# Altium PCB PCB_Wiring Diagram.pcbdoc
Units mm, origin at the board's own origin, x right, y up, seen from the top; angles counter-clockwise.
Board outline 108.59 x 103.38 mm, 2 copper layers (Top Layer, Bottom Layer); 9 components, 53 nets, 92 pads, 2 vias.
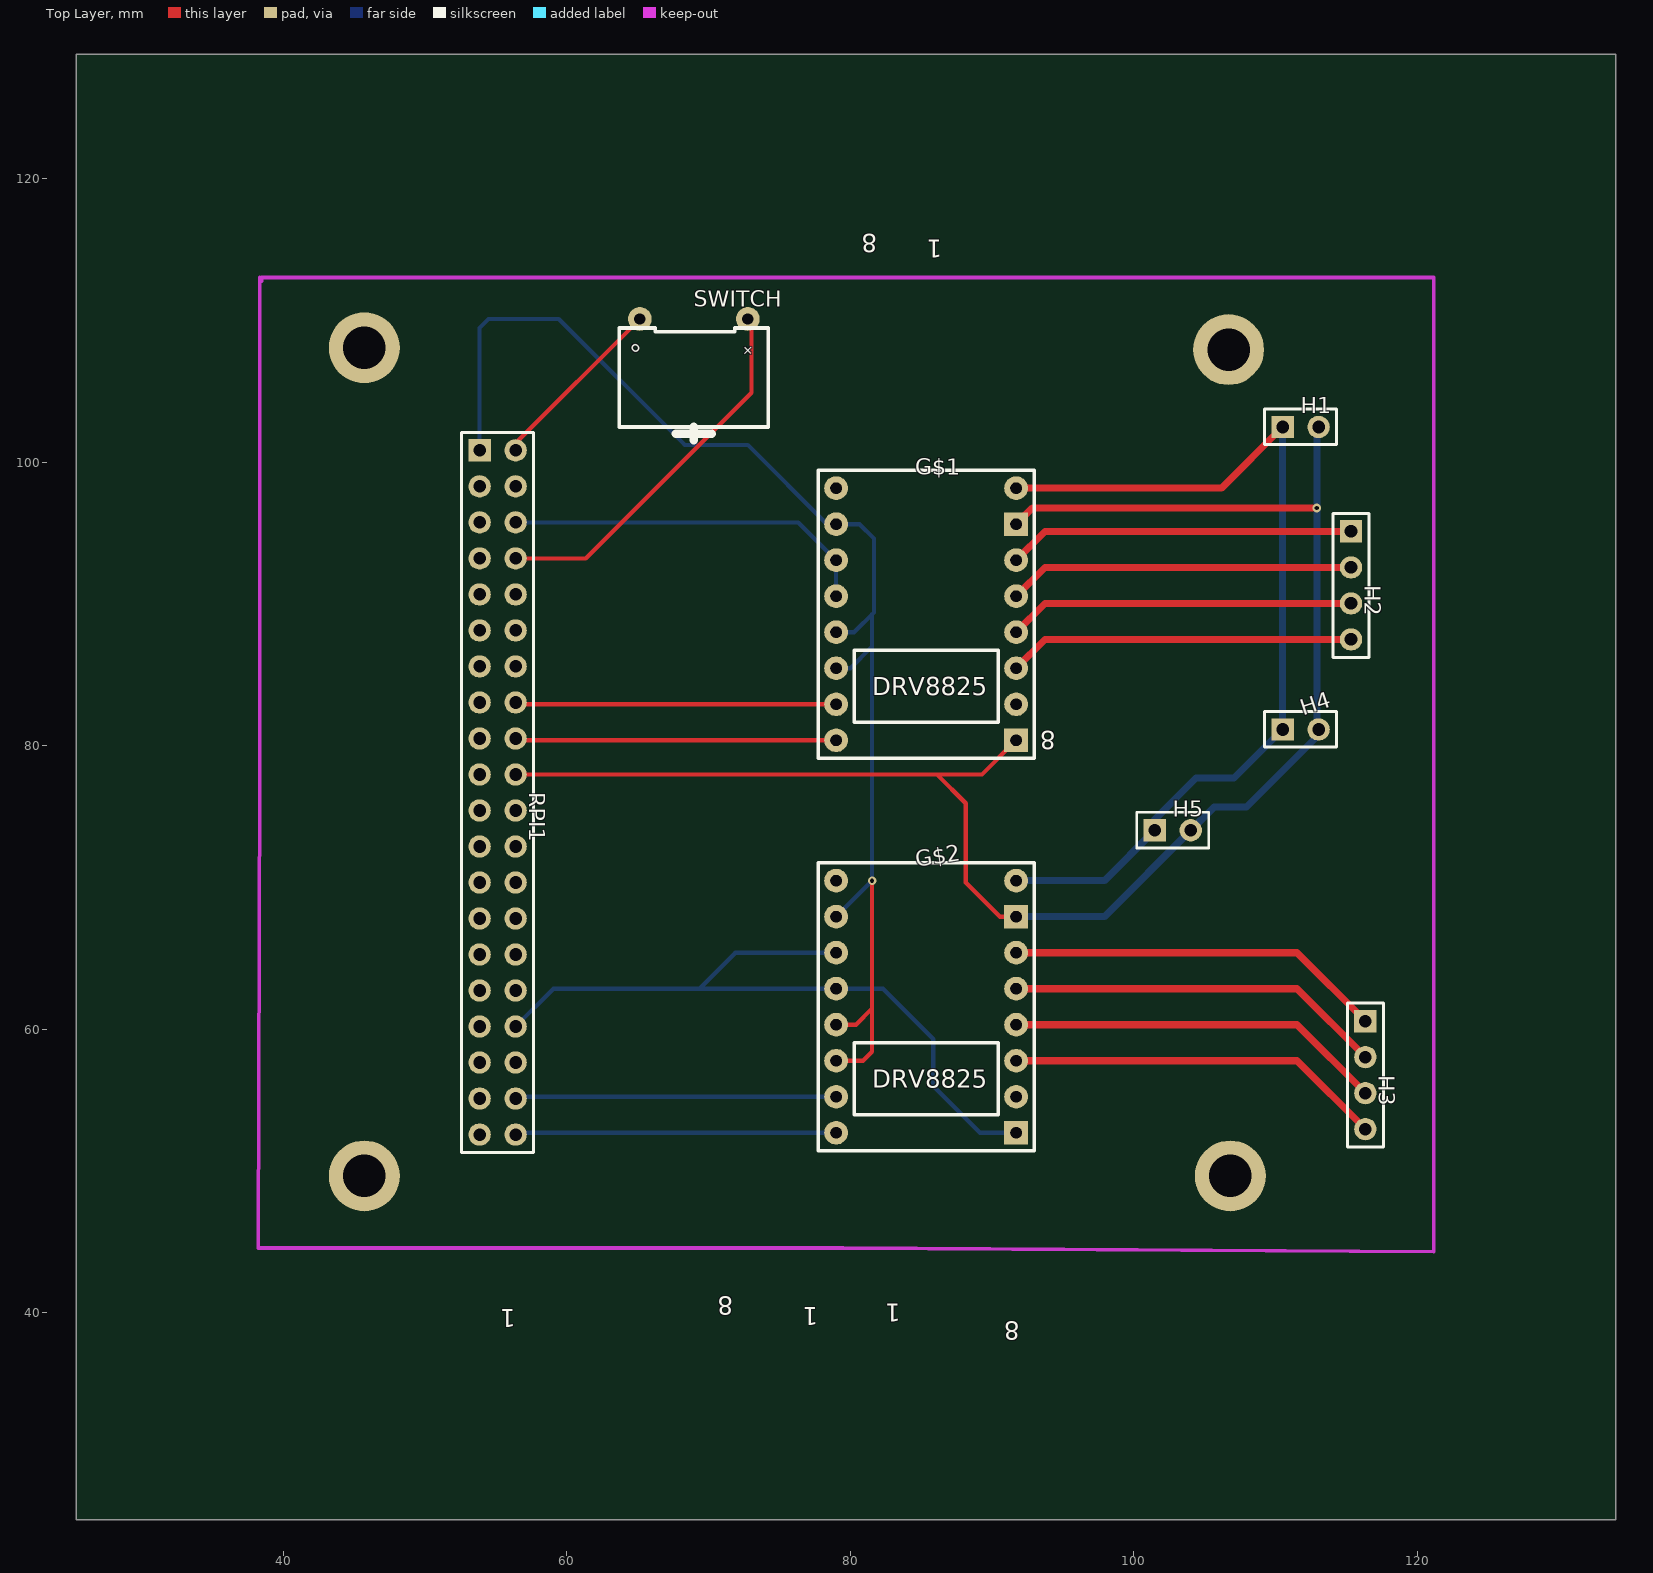
[diagram p0: Top Layer view]
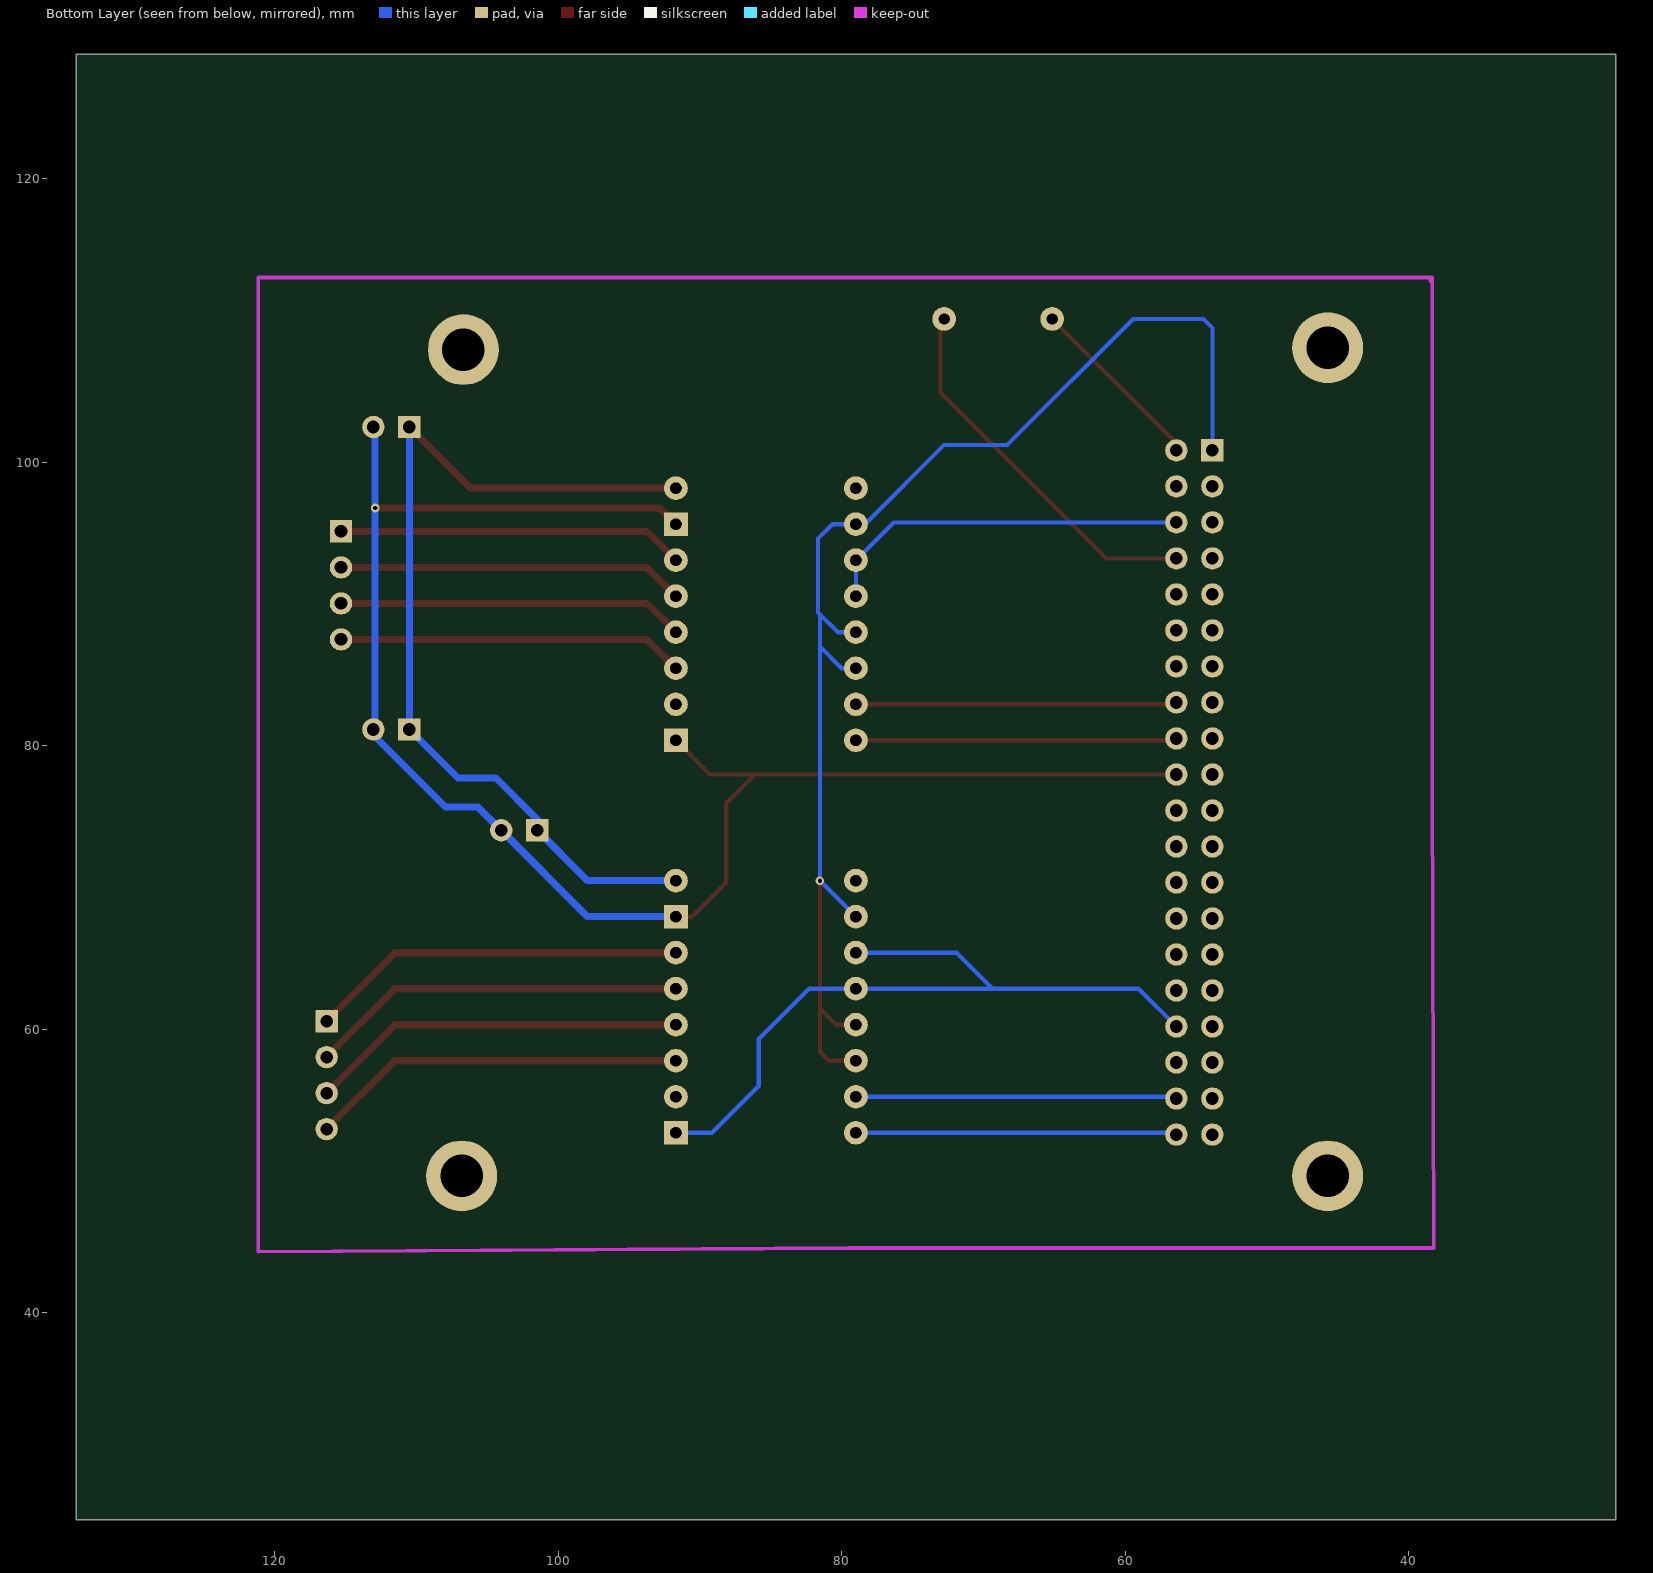
[diagram p1: Bottom Layer view, seen from below]

## Layer stack, top to bottom
Top Layer: signal copper (thickness not stored)
Dielectric: dielectric 0.32, FR-4, Dk 4.8
Bottom Layer: signal copper (thickness not stored)

## Board outline
133.988,25.4 25.4,25.4 25.4,128.778 133.988,128.778

## Components (designator, comment, footprint, x,y, rotation, side; value= is the part's Value field where it differs from the comment)
G$1 "POLOLU-DRV8825" POLOLU-DRV8825 91.694,95.631 r0 top
G$2 "POLOLU-DRV8825" POLOLU-DRV8825 91.694,67.945 r0 top
H1 "HDR-F-2.54_1x2" HDR-F-2.54_1X2 111.76,102.489 r0 top
H2 "HDR-F-2.54_1x4" HDR-F-2.54_1X4 115.316,91.313 r270 top
H3 "HDR-F-2.54_1x4" HDR-F-2.54_1X4 116.332,56.769 r270 top
H4 "HDR-F-2.54_1x2" HDR-F-2.54_1X2 111.76,81.153 r0 top
H5 "HDR-F-2.54_1x2" HDR-F-2.54_1X2 102.743,74.041 r0 top
RPI1 "Raspberry Pi 3 B+" HDR-20X2/2.54 55.118,76.708 r270 top
SWITCH "Emergency Stop" SW-08 68.961,110.109 r0 top

## Footprints (in the part's own frame and the unit in brackets; to place one, negate y for a bottom-side part, rotate by r counter-clockwise, add the part's x,y. Pads: shape width x height; smd on the part's side, far side on the other; paste and mask are expansions set on the pad)
HDR-20X2/2.54 [mil]
  rect 62x62 hole 35: 1(-950,-50)
  round 62 hole 35: 2(-950,50) 3(-850,-50) 4(-850,50) 5(-750,-50) 6(-750,50) 7(-650,-50) 8(-650,50) 9(-550,-50) 10(-550,50) 11(-450,-50) 12(-450,50) 13(-350,-50) 14(-350,50) 15(-250,-50) 16(-250,50) 17(-150,-50) 18(-150,50) 19(-50,-50) 20(-50,50) 21(50,-50) 22(50,50) 23(150,-50) 24(150,50) 25(250,-50) 26(250,50) 27(350,-50) 28(350,50) 29(450,-50) 30(450,50) 31(550,-50) 32(550,50) 33(650,-50) 34(650,50) 35(750,-50) 36(750,50) 37(850,-50) 38(850,50) 39(950,-50) 40(950,50)
  silkscreen extent -1000,-100 1000,100
HDR-F-2.54_1X2 [mil]
  rect 62x62 hole 35: 1(-50,0)
  round 62 hole 35: 2(50,0)
  silkscreen extent -100,-49 100,50
HDR-F-2.54_1X4 [mil]
  rect 62x62 hole 35: 1(-150,0)
  round 62 hole 35: 2(-50,0) 3(50,0) 4(150,0)
  silkscreen extent -200,-50 200,50
POLOLU-DRV8825 [mil]
  round 66 hole 31.5 slot 31.7 at 0 deg: A1(0,-300) A2(0,-400) B1(0,-200) B2(0,-100) DIR(-500,-600) EN_N(-500,100) FLT_N(0,-500) M0(-500,0) M1(-500,-100) M2(-500,-200) RST_N(-500,-300) SLP_N(-500,-400) STEP_N(-500,-500) VMOT(0,100)
  rect 66x66 hole 31.5 slot 31.7 at 0 deg: GND(0,-600) GND2(0,0)
  silkscreen extent -550,-650 50,150
SW-08 [mil]
  round 66 hole 31.4: P$2(-150,0) P$3(150,0)
  silkscreen extent -207,-336 207,-25

## Free pads (board coordinates)
  round 5 hole 3: 1(45.72,49.657) 1(45.72,108.077) 1(106.68,107.95) 1(106.807,49.657)

## Via types
v1: diameter 0.61, hole 0.305, Top Layer to Bottom Layer, 2 vias

## Nets (pads, with @x,y where several pads share a name; then routed paths per layer and width w, separated by ;. In a path a pad name is that pad's centre, name@x,y a point inside that pad or via, vN(x,y) a via of type N, cw(c..) or ccw(c..) an arc to the next point about the centre after c; other vN are vias at no path point)
G$1_A1: G$1.A1 H2.3 | length 24.5
  Top Layer w0.5: G$1.A1 93.726,90.043 H2.3
G$1_A2: G$1.A2 H2.4 | length 24.5
  Top Layer w0.5: G$1.A2 93.726,87.503 H2.4
G$1_B1: G$1.B1 H2.2 | length 24.5
  Top Layer w0.5: G$1.B1 93.726,92.583 H2.2
G$1_B2: G$1.B2 H2.1 | length 24.5
  Top Layer w0.5: G$1.B2 93.726,95.123 H2.1
G$1_DIR: G$1.DIR RPI1.18 | length 22.7
  Top Layer w0.3: RPI1.18 56.515,80.391 G$1.DIR
G$1_EN_N: G$1.EN_N
G$1_FLT_N: G$1.FLT_N
G$1_GND: G$1.GND G$1.GND2 G$2.GND2 H1.2 H4.2 H5.2 RPI1.20 | length 119.5
  Top Layer w0.3: RPI1.20 89.281,77.978 G$1.GND ; 86.108,77.978 88.138,75.948 88.138,70.358 90.551,67.945 G$2.GND2
  Top Layer w0.5: G$1.GND2 92.837,96.774 v1(112.903,96.774)
  Bottom Layer w0.5: G$2.GND2 97.917,67.945 H5.2 105.664,75.692 107.95,75.692 113.03,80.772 H4.2 112.903,81.28 v1(112.903,96.774) 112.903,102.362 H1.2
G$1_M0: G$1.M0 G$1.RST_N G$1.SLP_N G$2.M0 G$2.RST_N G$2.SLP_N RPI1.1 | length 95
  Top Layer w0.3: G$2.SLP_N 80.899,57.785 81.534,58.42 81.534,61.468 ; G$2.RST_N 80.391,60.325 81.534,61.468 ; v1(81.534,70.485) 81.534,61.468
  Bottom Layer w0.3: RPI1.1 53.848,109.474 54.483,110.109 59.436,110.109 68.326,101.219 72.771,101.219 78.359,95.631 G$1.M0 80.645,95.631 81.661,94.615 81.661,89.408 80.264,88.011 G$1.RST_N ; G$2.M0 v1(81.534,70.485) 81.534,86.995 ; G$1.SLP_N 80.01,85.471 81.534,86.995 ; 81.492,89.239 81.534,89.198 81.534,86.995
G$1_M1: G$1.M1 G$1.M2 RPI1.6 | length 26.3
  Bottom Layer w0.3: RPI1.6 76.327,95.758 G$1.M1 G$1.M2
G$1_STEP_N: G$1.STEP_N RPI1.16 | length 22.7
  Top Layer w0.3: RPI1.16 56.515,82.931 G$1.STEP_N
G$1_VMOT: G$1.VMOT G$2.VMOT H1.1 H4.1 H5.1 | length 65.6
  Top Layer w0.5: G$1.VMOT 106.172,98.171 H1.1
  Bottom Layer w0.5: G$2.VMOT 97.917,70.485 H5.1 101.473,74.803 104.394,77.724 107.061,77.724 H4.1 H1.1
G$2_A1: G$2.A1 H3.3 | length 26.6
  Top Layer w0.5: G$2.A1 111.506,60.325 H3.3
G$2_A2: G$2.A2 H3.4 | length 26.6
  Top Layer w0.5: G$2.A2 111.506,57.785 H3.4
G$2_B1: G$2.B1 H3.2 | length 26.6
  Top Layer w0.5: G$2.B1 111.506,62.865 H3.2
G$2_B2: G$2.B2 H3.1 | length 26.6
  Top Layer w0.5: G$2.B2 111.506,65.405 H3.1
G$2_DIR: G$2.DIR RPI1.40 | length 22.7
  Bottom Layer w0.3: RPI1.40 56.515,52.705 G$2.DIR
G$2_EN_N: G$2.EN_N
G$2_FLT_N: G$2.FLT_N
G$2_M1: G$2.GND G$2.M1 G$2.M2 RPI1.34 | length 53.2
  Bottom Layer w0.3: RPI1.34 59.055,62.865 G$2.M2 82.296,62.865 85.852,59.309 85.852,56.007 89.154,52.705 G$2.GND ; 69.35,62.865 71.89,65.405 G$2.M1
G$2_STEP_N: G$2.STEP_N RPI1.38 | length 22.7
  Bottom Layer w0.3: RPI1.38 56.515,55.245 G$2.STEP_N
RPI1_2: RPI1.2 SWITCH.P$2 | length 12.9
  Top Layer w0.3: RPI1.2 56.388,101.346 SWITCH.P$2
RPI1_3: RPI1.3
RPI1_4: RPI1.4
RPI1_5: RPI1.5
RPI1_7: RPI1.7
RPI1_8: RPI1.8 SWITCH.P$3 | length 26.8
  Top Layer w0.3: RPI1.8 61.341,93.218 73.025,104.902 73.025,109.855 SWITCH.P$3
RPI1_9: RPI1.9
RPI1_10: RPI1.10
RPI1_11: RPI1.11
RPI1_12: RPI1.12
RPI1_13: RPI1.13
RPI1_14: RPI1.14
RPI1_15: RPI1.15
RPI1_17: RPI1.17
RPI1_19: RPI1.19
RPI1_21: RPI1.21
RPI1_22: RPI1.22
RPI1_23: RPI1.23
RPI1_24: RPI1.24
RPI1_25: RPI1.25
RPI1_26: RPI1.26
RPI1_27: RPI1.27
RPI1_28: RPI1.28
RPI1_29: RPI1.29
RPI1_30: RPI1.30
RPI1_31: RPI1.31
RPI1_32: RPI1.32
RPI1_33: RPI1.33
RPI1_35: RPI1.35
RPI1_36: RPI1.36
RPI1_37: RPI1.37
RPI1_39: RPI1.39

## Text inside footprints (layer, text, board x,y; h text height)
G$1: Top Overlay "DRV8825" at 81.534,83.566 h1.27; Top Overlay "1" at 56.388,40.259 h1.27 r180; Top Overlay "8" at 81.915,116.078 h1.27 r180; Top Overlay "1" at 86.487,115.697 h1.27 r180; Top Overlay "8" at 94.488,81.026 h1.27 r180; Document "ENABLE 8" at 65.151,97.472 h1.65; Document "M0 7" at 70.909,94.805 h1.65; Document "M1 6" at 71.585,92.266 h1.65; Document "M2 5" at 70.909,89.725 h1.65; Document "RESET 4" at 66.571,87.185 h1.65; Document "SLEEP 3" at 66.721,84.645 h1.65; Document "STEP 2" at 68.042,82.105 h1.65; Document "DIR 1" at 70.993,79.692 h1.65; Document "1 VMOT" at 94.615,97.472 h1.65; Document "2 GND" at 94.488,94.805 h1.65; Document "3 B2" at 94.488,92.266 h1.65; Document "4 B1" at 94.488,89.725 h1.65; Document "5 A1" at 94.488,87.185 h1.65; Document "6 A2" at 94.488,84.645 h1.65; Document "7 FAULT" at 94.488,82.105 h1.65; Document "8 GND" at 94.488,79.566 h1.65
G$2: Top Overlay "DRV8825" at 81.534,55.88 h1.27; Top Overlay "1" at 77.724,40.386 h1.27 r180; Top Overlay "8" at 71.755,41.148 h1.27 r180; Top Overlay "1" at 83.566,40.64 h1.27 r180; Top Overlay "8" at 91.948,39.37 h1.27 r180; Document "ENABLE 8" at 62.357,74.231 h1.65; Document "M0 7" at 70.909,67.12 h1.65; Document "M1 6" at 71.585,64.579 h1.65; Document "M2 5" at 70.909,62.039 h1.65; Document "RESET 4" at 66.571,59.499 h1.65; Document "SLEEP 3" at 66.721,56.959 h1.65; Document "STEP 2" at 68.042,54.419 h1.65; Document "DIR 1" at 70.564,51.88 h1.65; Document "1 VMOT" at 93.98,69.406 h1.65; Document "2 GND" at 94.488,67.12 h1.65; Document "3 B2" at 94.488,64.579 h1.65; Document "4 B1" at 94.488,62.039 h1.65; Document "5 A1" at 94.488,59.499 h1.65; Document "6 A2" at 94.488,56.959 h1.65; Document "7 FAULT" at 94.488,54.419 h1.65; Document "8 GND" at 94.488,51.752 h1.65
SWITCH: Top Overlay "o" at 64.836,107.63 h0.76 r45; Top Overlay "+" at 72.685,107.35 h0.76 r45